# Altium PCB PoBoI.PcbDoc (part 2 of 3)
Units mm, origin at the board's own origin, x right, y up, seen from the top; angles counter-clockwise.
Board outline 90.25 x 95.8 mm, 4 copper layers (Top Layer, GND Layer, PWR Layer, Bottom Layer), stack 1.537 mm thick; 250 components, 177 nets, 942 pads, 26 vias.
Unrouted connection lines stored in the file: 170.
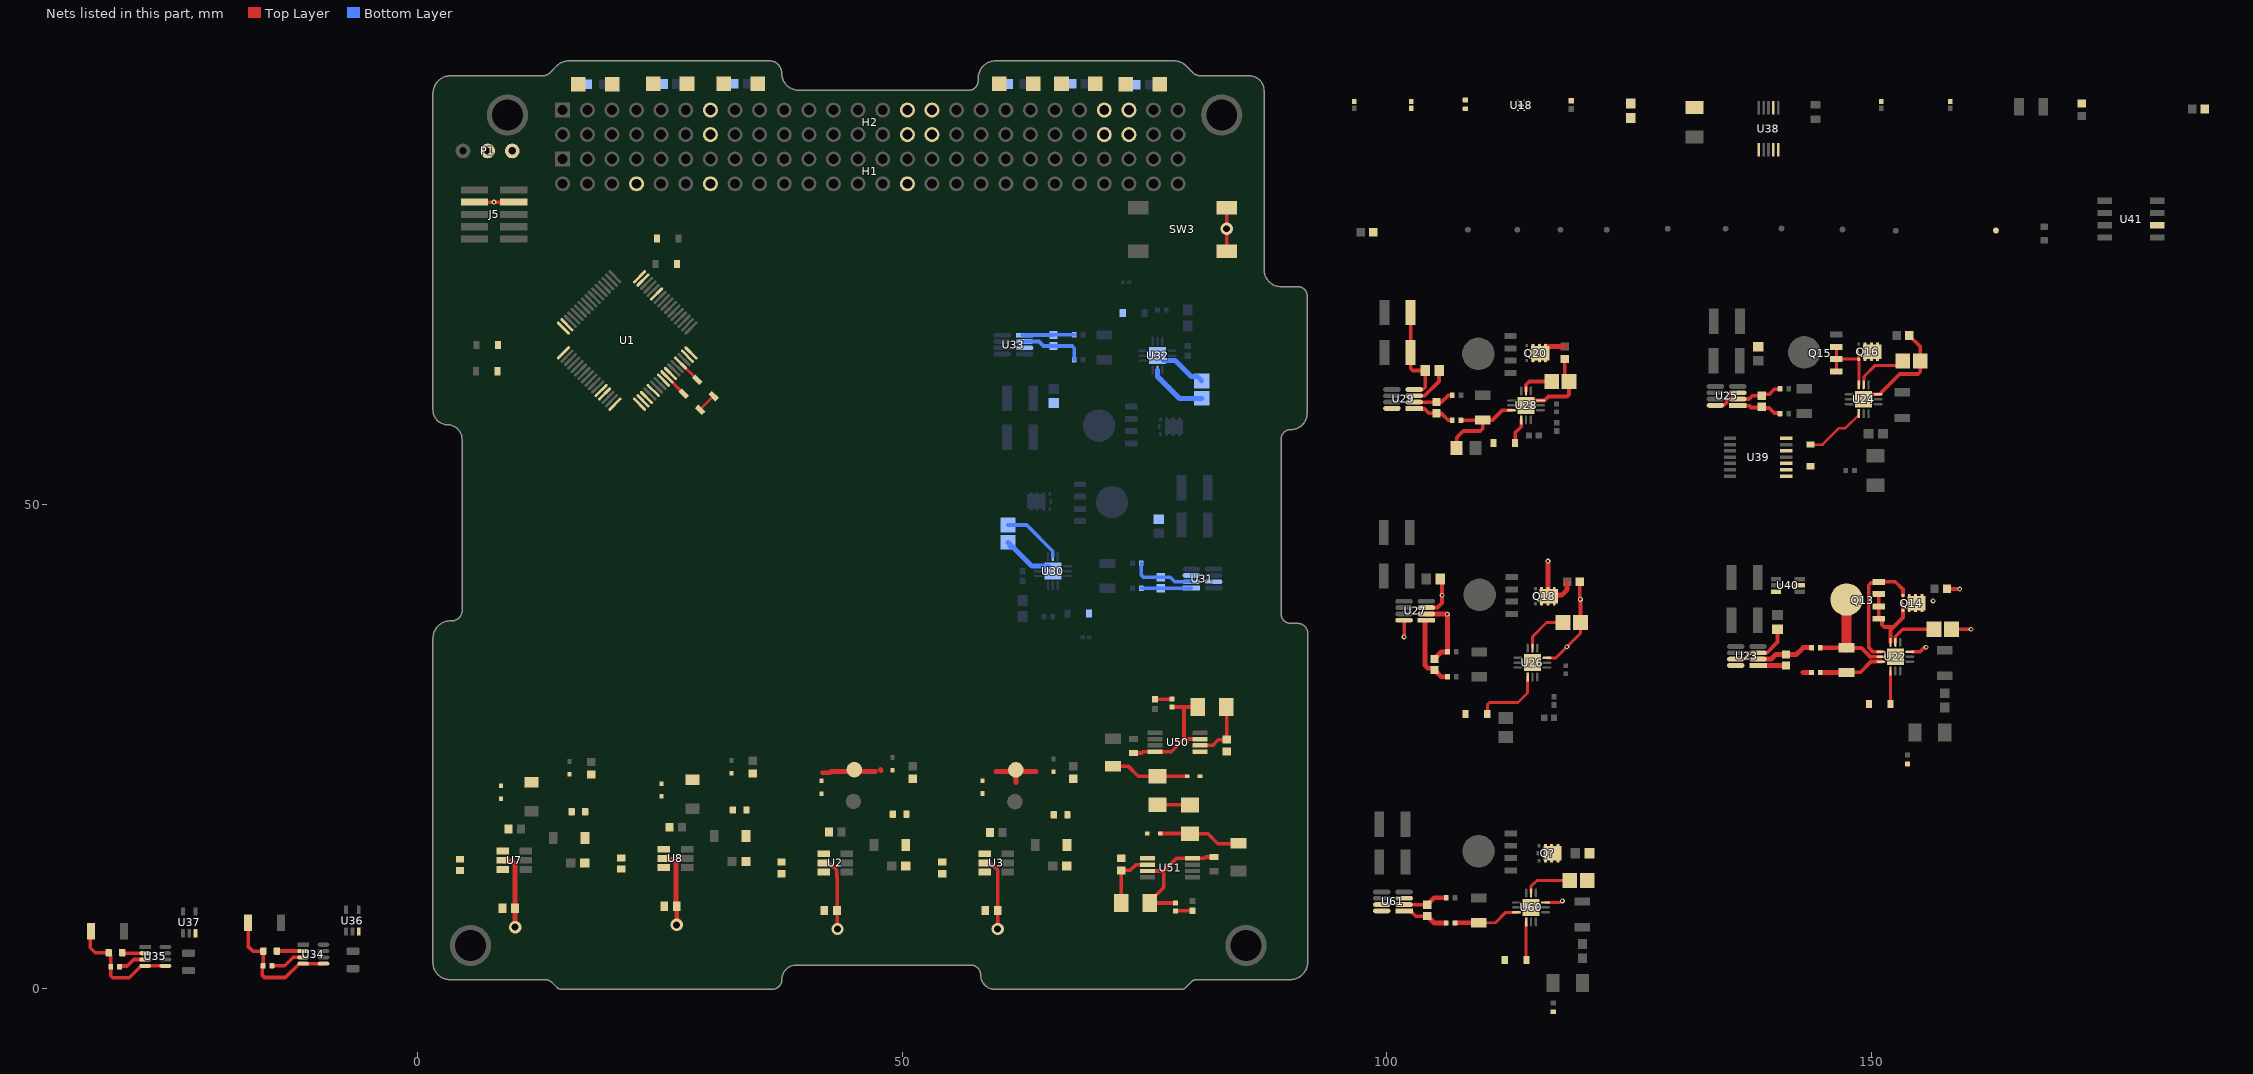
[diagram p4: the nets of this part, all layers, seen from the top]

## Part data
3V3 3V3P 3V3S 5V 5VP 5VS GND VBATT VBATTP VBATTS: library part CMP-00028-00002-2, "0.6mm round", Pins=1
C1 C2 C3 C4 C5 C6 C10 C11 C21 C23 C26 C28 C100 C101 C102: library part CMP-2006-03300-2, "CAP CER 0.1UF 50V X7R 0603 / C0603X104K5RACTU", Capacitance=100nF, Manufacturer=Kemet, Manufacturer Part Number=C0603X104K5RACTU, Package=C0603-CJ, Temperature="-55°C to +125°C", Temperature Characteristic=X7R, Temperature Coefficient=15%, Temperature Range High=+125°C, Temperature Range Low=-55°C, Tolerance=10%, Voltage=50V, Automotive=No, Category=Cap, ComponentLink2Description=Datasheet, ComponentLink2URL=https://content.kemet.com/datasheets/KEM_C1013_X7R_FT-CAP_SMD.pdf, Device Class L1="Passive Components", Device Class L2=Capacitors, Device Class L3="Ceramic Capacitors", Digikey Description="CAP CER 0.1UF 50V X7R 0603", Height=0.95mm, Ipc Land Pattern Name=CAPC16080X80, Lead Free=Yes, Material=Ceramic, Mouser Description="Capacitor; Ceramic; Cap 0.1uF; Tol+10%; SMT; Flexible Termination; Vol-Rtg 50V; TR", Octopart=https://octopart.com/c0603x104k5ractu-kemet-9145062, RoHS=TRUE, Voltage Rating=50V
C7 C19: library part CMP-13271-001107-1, "Cap Ceramic 1uF 25V X7R ±10% Pad SMD 0603 +125°C T/R / CL10B105KA8NFNC", Case Code (Imperial)=0603, Case Code (Metric)=1608, Dielectric=X7R, Max Operating Temperature=125°C, Min Operating Temperature=-55°C, Package Quantity=1, Tolerance=10%, Voltage Rating=25V, Capacitance=1uF, Case/Package=0603, Depth=0.8mm, Height=0.8mm, Lead Free="Lead Free", Length=0.063inch, Mount="Surface Mount", Packaging="Tape and Reel", Radiation Hardening=No, Thickness=0.035inch, Width=0.031inch
C8 C12 C24 C29: library part CMP-001-00075-4, "Chip Capacitor, 10µF +/-20%, 10V, 0603, Thickness 1 mm", Case/Package=0603, Max Operating Temperature=85°C, Min Operating Temperature=-55°C, Tolerance=10%, Voltage Rating=10V, Mounting Technology=SMT, Pins=2
C25 C27: library part CMP-13271-001107-1, "Cap Ceramic 1uF 25V X7R ±10% Pad SMD 0603 +125°C T/R", Case Code (Imperial)=0603, Case Code (Metric)=1608, Dielectric=X7R, Max Operating Temperature=125°C, Min Operating Temperature=-55°C, Package Quantity=1, Tolerance=10%, Voltage Rating=25V, Capacitance=1uF, Case/Package=0603, Depth=0.8mm, Height=0.8mm, Lead Free="Lead Free", Length=0.063inch, Mount="Surface Mount", Packaging="Tape and Reel", Radiation Hardening=No, Thickness=0.035inch, Width=0.031inch
C75 C76: library part CMP-001-00088-1, "Ceramic Capacitor, Multilayer, Ceramic, 6.3V, 10% +Tol, 10% -Tol, X5R, 15% TC, 1uF, Surface Mount, 0201", Capacitor Type=Ceramic, Case/Package=0201, Max Operating Temperature=85°C, Min Operating Temperature=-55°C, Mounting Technology="Surface Mount", Pins=2, RoHS Compliant=Yes
C77 C80 C83 C86 C89 C92 C122: library part CMP-001-00086-1, "Ceramic Capacitor, Multilayer, Ceramic, 50V, 10% +Tol, 10% -Tol, X7R, 15% TC, 0.18uF, Surface Mount, 0805", Capacitor Type=Ceramic, Case/Package=0805, Max Operating Temperature=125°C, Min Operating Temperature=-55°C, Mounting Technology="Surface Mount", Pins=2, RoHS Compliant=Yes
C78 C81 C84 C87 C90 C93 C120: library part CMP-001-00005-6, "Chip Capacitor, 1 uF, +/- 10%, 25 V, 0603 (1608 Metric)", Capacitor Type=Ceramic, Case/Package=0603, Max Operating Temperature=125°C, Min Operating Temperature=-55°C, Tolerance=10%, Voltage Rating=25V, Mounting Technology=SM, Pins=2, RoHS Compliant=True
C79 C82 C85 C88 C91 C94 C121: library part CMP-001-00004-6, "Chip Capacitor, 1 uF, +/- 10%, 16 V, 0603 (1608 Metric)", Capacitor Type=Ceramic, Case/Package=0603, Max Operating Temperature=125°C, Min Operating Temperature=-55°C, Tolerance=10%, Voltage Rating=16V, Mounting Technology=SM, Pins=2, RoHS Compliant=True
C95 C97: library part CMP-001-00056-4, "Chip Capacitor, 2,2µF +/-20%, 10V, 0402, Thickness 0.6 mm", Case/Package=0402, Max Operating Temperature=85°C, Min Operating Temperature=-55°C, Tolerance=10%, Voltage Rating=10V, Mounting Technology=SMT, Pins=2
C96 C98: library part CMP-001-00078-4, "Chip Capacitor, 1µF +/-40%, 50V, 0603, Thickness 1 mm", Case/Package=0603, Max Operating Temperature=85°C, Min Operating Temperature=-55°C, Tolerance=10%, Voltage Rating=50V, Mounting Technology=SMT, Pins=2
C99: library part CMP-001-00003-6, "Chip Capacitor, 1 uF, +/- 10%, 16 V, 0603 (1608 Metric)", Capacitor Type=Ceramic, Case/Package=0603, Max Operating Temperature=125°C, Min Operating Temperature=-55°C, Tolerance=10%, Voltage Rating=16V, Mounting Technology=SM, Pins=2, RoHS Compliant=True
C103 C104: library part CMP-2010-01302-2, "Chip Multilayer Ceramic Capacitors for General Purpose, 0201, 10pF, C0G, 30ppm/°C, 5%, 25V", Capacitance=10pF, Case Code (Imperial)=0201, Case Code (Metric)=0603, Dielectric=C0G, Max Operating Temperature=125°C, Min Operating Temperature=-55°C, Package Quantity=1, Tolerance=5%, Voltage Rating=25V, Case/Package=0201, Depth=0.3mm, Lead Free="Lead Free", Length=0.024inch, Mount="Surface Mount", Packaging="Tape and Reel", REACH SVHC="No SVHC", Series=GRM, Termination=SMD/SMT, Thickness=0.013inch, Voltage Rating (DC)=25V, Width=0.012inch
Cc Cc1: library part CMP-2008-03290-2, "CAP CER 2200PF 25V 5% NP0 0402", Capacitance="2,200 pF", Manufacturer=Kemet, Manufacturer Part Number=C0402C222J3GACTU, Package=C0402-BB, Temperature="-55°C to +125°C", Temperature Characteristic=C0G, Temperature Coefficient=15%, Temperature Range High=+125°C, Temperature Range Low=-55°C, Tolerance=0.05, Voltage Rating="25 V", Automotive=No, Category=Cap, ComponentLink2Description=Datasheet, ComponentLink2URL=https://content.kemet.com/datasheets/KEM_C1002_X7R_SMD.pdf, Device Class L1="Passive Components", Device Class L2=Capacitors, Device Class L3="Ceramic Capacitors", Digikey Description="CAP CER 2200PF 25V 5% NP0 0402", Height=0.55mm, Ipc Land Pattern Name=CAPC10050X50, Lead Free=Yes, Material=Ceramic, Mouser Description="Multilayer Ceramic Capacitors MLCC - SMD/SMT 25V 0.0022uF 5% C0G", Octopart=https://octopart.com/c0402c222j3gactu-kemet-9145102, RoHS=TRUE
Cin Cin1 Cout Cout1: library part CMP-13271-002013-1, "Cap Ceramic 22uF 16V X5R ±20% SMD 1206 +85°C Embossed T/R", Case Code (Imperial)=1206, Case Code (Metric)=3216, Dielectric=X5R, Max Operating Temperature=85°C, Min Operating Temperature=-55°C, Package Quantity=1, Tolerance=20%, Voltage=16V, Capacitance=22uF, Case/Package=1206, Depth=1.6mm, Height=0.85mm, Lead Free="Lead Free", Length=3.2mm, Mount="Surface Mount", Packaging="Tape and Reel", Radiation Hardening=No, Thickness=0.037inch, Voltage Rating=16V, Width=0.063inch
D1 D3 D5 D7 D11 D12 D52 D53 D54 D55: library part CMP-07163-000008-1, "DIODE GEN PURP 75V 200MA SOD523F", Capacitance=4pF, Forward Current=300mA, Manufacturer="ON Semiconductor", Max Junction Temp=+150°C, Max Repetitive Reverse Voltage=75V, Package=502-01, Peak Reverse Current=5uA, Reverse Voltage=100V, Temperature="-55°C to +150°C", Temperature Range Low=-55°C, Automotive=No, Category=Diode, ComponentLink2Description=Datasheet, ComponentLink2URL=https://www.onsemi.com/pub/Collateral/1N914BWT-D.pdf, Device Class L1="Discrete Semiconductors", Device Class L2=Diodes, Device Class L3="Rectifier Diodes", Digikey Description="DIODE GEN PURP 75V 200MA SOD523F", Footprint Url=https://www.onsemi.com/pub/Collateral/502-01.PDF, Height=0.7mm, Ipc Land Pattern Name=SODFL16080X60, Lead Free=Yes, Manufacturer Part Number=1N914BWT, Mouser Description="Diodes - General Purpose, Power, Switching SINGLE JUNC. 100V 4.0NS COMP", Octopart=https://octopart.com/1n914bwt-on+semiconductor-84323166, RoHS=TRUE, Temperature Range High=+150°C
D2 D4 D6 D8: library part CMP-2000-05113-2, "DIODE SCHOTTKY 30V 500MA SOD123", Average Rectified Current=500mA, Forward Voltage=430mV, Max Forward Surge Current (Ifsm)=5.5A, Max Operating Temperature=150°C, Max Repetitive Reverse Voltage (Vrrm)=30V, Max Reverse Leakage Current=130uA, Min Operating Temperature=-65°C, Package Quantity=1, Contact Plating=Tin, Current Rating=500mA, Element Configuration=Single, Forward Current=500mA, Height=1.03mm, Lead Free="Lead Free", Length=2.7mm, Max Reverse Voltage (DC)=30V, Max Surge Current=5.5A, Mount="Surface Mount", Number of Pins=2, Output Current=500mA, Packaging="Tape and Reel", Peak Non-Repetitive Surge Current=5.5A, Peak Reverse Current=130uA, Polarity=Standard, Radiation Hardening=No, REACH SVHC="No SVHC", Voltage Rating (DC)=30V, Weight=0.03g, Width=1.6mm
D38 D41 D47 D50 D56 D57 D58 D59 D60 D61 D?: library part CMP-1060-00650-1, "Zener Voltage Regulator, 300 mW, 2-Pin SOD-323, Pb-Free, Tape and Reel", Manufacturer="On Semiconductor", ComponentLink1Description="Manufacturer URL", ComponentLink1URL=http://www.onsemi.com/, ComponentLink2Description=Datasheet, ComponentLink2URL=http://www.onsemi.cn/pub_link/Collateral/MM3Z2V4T1-D.PDF, ComponentLink3Description="Package Specification", ComponentLink3URL=http://www.onsemi.com/pub_link/Collateral/477-02.PDF.1, DatasheetVersion="Rev. 9", Mounting Technology="Surface Mount", P Max (W)=0.3, PackageDescription="2-Pin SOD, Body 1.7 x 1.25 mm", PackageReference=SOD-323-2-477-02, PackageVersion="Rev. H, 03/2007", Packing="Tape and Reel", PartNumber=MM3Z3V6T1G, RoHS=Pb-Free, VZ Typ (V)=3.6
D63: library part CMP-004-00035-2, "Rectifier Diode, 1 Phase, 1 Element, 0.15A, 100V V(RRM), Silicon"
D64: library part CMP-004-00035-3, "Rectifier Diode, 1 Phase, 1 Element, 0.15A, 100V V(RRM), Silicon"
H1 H2: library part CMP-1023-00317-1, "SQ Post Socket, Through-hole, Vertical, -55 to 125 degC, 2.54 mm Pitch, 52-Pin, Female, RoHS", Manufacturer=Samtec, Temperature Range="-55 to 125 degC", ComponentLink1Description="Manufacturer URL", ComponentLink1URL=http://www.samtec.com, ComponentLink2Description=Datasheet, ComponentLink2URL=http://www.samtec.com/documents/webfiles/pdf/SSQ_TH.PDF, ComponentLink3Description="Package Specification", ComponentLink3URL=http://www.samtec.com/documents/webfiles/cpdf/SSQ-1XX-XX-XXX-X-XX-XXX-XX-X-MKT.pdf, DatasheetVersion=F-214, Mounting Technology=Through-hole, Orientation=Vertical, PackageDescription="Assembly, Socket Strip .025[0.64] SQ Tail", PackageReference=SSQ-126-22-X-D, PackageVersion="BD, 6/1987", PartNumber=SSQ-126-22-G-D, Pitch="2.54 mm", RoHS=True
J5: library part CMP-002-00076-1, "Board Connector, 10 Contact(s), 2 Row(s), Male, Straight, 0.05 inch Pitch, Surface Mount Terminal, Locking", Connector Type="BOARD CONNECTOR", Mounting Technology=Board, RoHS Compliant=Yes
L1 L2: library part CMP-06042-015693-1, "Wire Wound Ferrite Inductor for General Circuits 15μH ±10% 0.73Ω 360mA 1812", Case Code (Imperial)=1812, Case Code (Metric)=4532, Current Rating=360mA, DC Resistance (DCR)=730mR, Frequency=19MHz, Max Operating Temperature=85°C, Min Operating Temperature=-40°C, Package Quantity=500, Resistor Type=Wirewound, Test Frequency=1MHz, Tolerance=10%, Case/Package=1812, Core Material=Ferrite, DC Current=360mA, Depth=3.4mm, Height=2.6mm, Height - Seated (Max)=0.11inch, Inductance=15uH, Lead Free="Lead Free", Length=4.5mm, Max DC Current=360mA, Military Standard=Not, Mount="Surface Mount", Packaging="Tape and Reel", Q Factor=35, Radiation Hardening=No, Self Resonant Frequency=19MHz, Series=LQH43M, Series Resistance=730mR, Shielding=Unshielded, Termination=SMD/SMT, Weight=0.004586oz, Width=3.2mm
L3 L4: library part CMP-006-00022-2, "Inductor Power Molded Wirewound 10uH 20% 100KHz 1.2A 0.522Ohm DCR Automotive T/R", DC Resistance MAX="522 mOhms", DC Resistance Typical="435 mOhms", Inductance=10uH, Rated Current=1.20A, Saturation Current=1.6A
L11 L12: library part CMP-08253-000012-2, "Shielded Multilayer Inductor 10uH ±20% 250mA 1365mΩ SMD 0603", Case Code (Imperial)=0603, Case Code (Metric)=1608, Current Rating=250mA, DC Resistance (DCR)=1.365R, Max Operating Temperature=125°C, Min Operating Temperature=-55°C, Package Quantity=4000, Resistance=1.05R, Saturation Current=90mA, Self Resonant Frequency=50MHz, Test Frequency=2MHz, Tolerance=20%, Case/Package=0603, Core Material=Ferrite, Height - Seated (Max)=0.037inch, Inductance=10uH, Length=0.063inch, Mount="Surface Mount", Packaging="Tape and Reel", RoHS Compliant=Yes, Shielding=Shielded, Width=0.031inch
LED1 LED2 LED3 LED4 LED5 LED6: library part CMP-21615-000001-1, "LED RED DIFFUSED CHIP SMD", Case Code (Imperial)=1206, Case Code (Metric)=3216, Color=Red, Forward Current=20mA, Forward Voltage=2.1V, Lens Color=White, Max Operating Temperature=85°C, Min Operating Temperature=-40°C, Package Quantity=1, Power Dissipation=65mW, Reverse Voltage=5V, Case/Package=1206, Depth=1.6mm, Dominant Wavelength=626nm, Height=1.1mm, Illumination Color=Red, Lead Free="Lead Free", Length=3.2mm, Lens Style=Rectangular, Lens Transparency=Diffused, Luminous Intensity=10mcd, Mount="Surface Mount", Number of Elements=1, Number of LEDs=1, Number of Pins=2, Packaging="Tape and Reel", Power Rating=65mW, Radiation Hardening=No, REACH SVHC="No SVHC", Test Current=20mA, Viewing Angle=170°, Wavelength=626nm, Width=1.6mm
P1: library part CMP-002-00073-2, "KK 254 Breakaway Header, Vertical, 3 Circuits, 0.76µm Gold (Au) Selective Plating, Mating Pin Length 6.09mm", Max Operating Temperature=75°C, Min Operating Temperature=0°C, Voltage Rating=250V, Gender=Male, Mounting Technology="Through Hole", Pins=3
Q13 Q15 Q17 Q19 Q20 Q21 Q23: library part CMP-013-00040-1, "Power Field-Effect Transistor, 23.5A I(D), 60V, 0.00625ohm, 1-Element, N-Channel, Silicon, Metal-oxide Semiconductor FET", Max Operating Temperature=150°C, Pins=5, RoHS Compliant=Yes
Q14 Q16 Q18 Q20 Q22 Q24 Q?: library part CMP-013-00041-1, "Power Field-Effect Transistor, 11.6A I(D), 30V, 0.0145ohm, 1-Element, N-Channel, Silicon, Metal-oxide Semiconductor FET", Max Operating Temperature=150°C, Pins=3, RoHS Compliant=Yes
R9 R12: library part CMP-2000-03264-2, "RES Thick Film, 35.7kΩ, 1%, 0.1W, 100ppm/°C, 0603", Case Code (Imperial)=0603, Case Code (Metric)=1608, Max Operating Temperature=155°C, Max Power Dissipation=100mW, Min Operating Temperature=-55°C, Package Quantity=10, Resistance=35.7kR, Temperature Coefficient=100ppm/°C, Tolerance=1%, Voltage Rating=75V, Case/Package=0603, Composition="Thick Film", Contact Plating=Tin, Depth=0.85mm, Features="Automotive AEC-Q200", Height=0.45mm, Length=1.55mm, Military Standard=Not, Number of Pins=2, Number of Terminations=2, Packaging="Tape and Reel", Power Rating=100mW, Radiation Hardening=No, Termination=Solder, Weight=7.1E-05oz, Width=0.033inch
R11 R26 R29 R44: library part CMP-1666-00005-4, "Chip Resistor, 10 KOhm, +/- 1%, 100 mW, -55 to 155 degC, 0603 (1608 Metric), RoHS, Tape and Reel / CRCW060310K0FKEA", Manufacturer="Vishay Semiconductor", Max Operating Temperature="155 degC", Min Operating Temperature="-55 degC", Package Quantity=5000, Voltage Rating="75 V", ComponentLink1Description="Manufacturer URL", ComponentLink1URL=http://www.vishay.com/, ComponentLink2Description=Datasheet, ComponentLink2URL=https://datasheet.ciiva.com/11809/0900766b80d98afc-11809037.pdf, DatasheetVersion=06/2012, Height="0.45 mm", Length="1.55 mm", Mounting Technology="Surface Mount", PackageDescription="2-Pin Surface Mount Device, Body 1.575 x 0.85 mm", PackageReference=0603, Packaging="Tape and Reel", REACH SVHC=Unknown, RoHSCompliant=true
R28 R34: library part CMP-2000-03094-1, Manufacturer="Vishay Dale", Part Number=CRCW060322K1FKEA
R40: library part CMP-2002-07452-1, Manufacturer="Yageo / Phycomp", Part Number=RC0402FR-071K1L
R41: library part CMP-009-00099-2, "3K 0.063W 1% 0402 (1005 Metric)  SMD", Case/Package=0402, Power=63mW, Tolerance=1%, Mounting Technology=SMT, Pins=2
R80 R90 R151: library part CMP-009-00110-2, "768K 0.063W 1% 0402 (1005 Metric)  SMD", Case/Package=0402, Power=63mW, Tolerance=1%, Mounting Technology=SMT, Pins=2
R81 R91 R152: library part CMP-009-00195-1, "Fixed Resistor, Metal Glaze/thick Film, 0.25W, 7500ohm, 200V, 1% +/-Tol, 100ppm/Cel, Surface Mount, 1206", Case/Package=1206, Max Operating Temperature=155°C, Min Operating Temperature=-55°C, Power=250mW, Tolerance=1%, Mounting Technology="Surface Mount", Pins=2, RoHS Compliant=Yes
R82 R92 R153: library part CMP-009-00194-1, "Fixed Resistor, Thin Film, 0.15W, 80000ohm, 75V, 0.1% +/-Tol, 25ppm/Cel, Surface Mount, 0603", Case/Package=0603, Max Operating Temperature=150°C, Min Operating Temperature=-55°C, Power=150mW, Tolerance=0.1%, Mounting Technology="Surface Mount", Pins=2, RoHS Compliant=Yes
R83 R93 R154: library part CMP-009-00193-1, "Fixed Resistor, Thin Film, 0.25W, 150000ohm, 200V, 1% +/-Tol, 50ppm/Cel, Surface Mount, 1206", Case/Package=1206, Max Operating Temperature=155°C, Min Operating Temperature=-55°C, Power=250mW, Tolerance=1%, Mounting Technology="Surface Mount", Pins=2, RoHS Compliant=Yes
R84 R94 R103 R112 R121 R130 R150: library part CMP-26527-000133-1, "General Purpose Thick Film Chip Resistor, 1206, 25mΩ, 1%, 0.5W", Case Code (Imperial)=1206, Case Code (Metric)=3216, Max Operating Temperature=155°C, Max Power Dissipation=500mW, Min Operating Temperature=-55°C, Resistance=25m, Resistor Type="Thick Film", Temperature Coefficient=100ppm/°C, Tolerance=1%, Case/Package=1206, Construction=Rectangular, Contact Plating=Tin, Depth=1.55mm, Height=0.026inch, Lead Free="Lead Free", Length=0.12inch, Military Standard=Not, Mount="Surface Mount", Number of Terminations=2, Packaging="Tape and Reel", Power Rating=500mW, Radiation Hardening=No, RoHS Compliant=Yes, Series=CSR, Size Code=1206, Width=0.061inch
R85: library part CMP-009-00069-2, "120R 0.1W 5% 0603 (1608 Metric)  SMD", Case/Package=0603, Power=100mW, Tolerance=5%, Mounting Technology=SMT, Pins=2
R86 R87 R95 R96 R104 R105 R113 R114 R122 R123 R131 R132 R155 R156: library part CMP-009-00152-3, "Chip Resistor, 10 Ohms, +/-1 %, 63 mW, -55 to 155 degC, 0402", Case/Package=0402, Max Operating Temperature=155°C, Min Operating Temperature=-55°C, Power=63mW, Tolerance=1%, Pins=2
R88 R89 R97 R98 R106 R107 R115 R116 R124 R125 R133 R134 R157 R158: library part CMP-009-00192-1, "Fixed Resistor, Metal Glaze/thick Film, 0.5W, 3300ohm, 200V, 5% +/-Tol, 200ppm/Cel, Surface Mount, 1210", Case/Package=1210, Max Operating Temperature=155°C, Min Operating Temperature=-55°C, Power=500mW, Tolerance=5%, Mounting Technology="Surface Mount", Pins=2, RoHS Compliant=Yes
R99 R108: library part CMP-009-00197-1, "Fixed Resistor, Metal Glaze/thick Film, 0.125W, 732000ohm, 150V, 1% +/-Tol, 100ppm/Cel, Surface Mount, 0805", Case/Package=0805, Max Operating Temperature=155°C, Min Operating Temperature=-55°C, Power=125mW, Tolerance=1%, Mounting Technology="Surface Mount", Pins=2, RoHS Compliant=Yes
R100 R109: library part CMP-009-00015-5, "Chip Resistor, 10 KOhm, +/- 1%, 0.1 W, -55 to 155 degC, 0402 (1005 Metric)", Case/Package=0402, Max Operating Temperature=155°C, Min Operating Temperature=-55°C, Power=100mW, Tolerance=1%, Voltage Rating=50V, Mounting Technology=SM, Pins=2, RoHS Compliant=True
R101 R110: library part CMP-009-00202-1, "Fixed Resistor, Metal Glaze/thick Film, 0.0625W, 60400ohm, 50V, 1% +/-Tol, 100ppm/Cel, Surface Mount, 0402", Case/Package=0402, Max Operating Temperature=155°C, Min Operating Temperature=-55°C, Power=62.5mW, Tolerance=1%, Mounting Technology="Surface Mount", Pins=2, RoHS Compliant=Yes
R102 R111: library part CMP-009-00204-1, "Fixed Resistor, Metal Glaze/thick Film, 0.2W, 220000ohm, 50V, 5% +/-Tol, 200ppm/Cel, Surface Mount, 0402", Case/Package=0402, Max Operating Temperature=155°C, Min Operating Temperature=-55°C, Power=200mW, Tolerance=5%, Mounting Technology="Surface Mount", Pins=2, RoHS Compliant=Yes
R117 R126: library part CMP-009-00205-1, "Fixed Resistor, Metal Glaze/thick Film, 0.05W, 866000ohm, 25V, 1% +/-Tol, -200,200ppm/Cel, 0201", Case/Package=0201, Max Operating Temperature=125°C, Min Operating Temperature=-55°C, Power=50mW, Tolerance=1%, Pins=2, RoHS Compliant=Yes
R118 R127: library part CMP-009-00089-2, "2K37 0.063W 1% 0402 (1005 Metric)  SMD", Case/Package=0402, Power=63mW, Tolerance=1%, Mounting Technology=SMT, Pins=2
R119 R128: library part CMP-009-00206-1, "Fixed Resistor, Metal Glaze/thick Film, 0.1W, 37400ohm, 75V, 1% +/-Tol, 100ppm/Cel, Surface Mount, 0603", Case/Package=0603, Max Operating Temperature=155°C, Min Operating Temperature=-55°C, Power=100mW, Tolerance=1%, Mounting Technology="Surface Mount", Pins=2, RoHS Compliant=Yes
R120 R129: library part CMP-009-00022-5, "Chip Resistor, 100 KOhm, +/- 1%, 0.1 W, -55 to 155 degC, 0402 (1005 Metric)", Case/Package=0402, Max Operating Temperature=155°C, Min Operating Temperature=-55°C, Power=100mW, Tolerance=1%, Voltage Rating=50V, Mounting Technology=SM, Pins=2, RoHS Compliant=True
R135 R136: library part CMP-009-00076-2, "1K 0.125W 5% 0805 (2012 Metric)  SMD", Case/Package=0805, Power=125mW, Tolerance=5%, Mounting Technology=SMT, Pins=2
R137: library part CMP-009-00025-5, "Chip Resistor, 100 KOhm, +/- 1%, 0.25 W, -55 to 155 degC, 1206 (3216 Metric)", Case/Package=1206, Max Operating Temperature=155°C, Min Operating Temperature=-55°C, Power=250mW, Tolerance=1%, Voltage Rating=200V, Mounting Technology=SM, Pins=2, RoHS Compliant=True
R138: library part CMP-009-00017-5, "Chip Resistor, 10 KOhm, +/- 1%, 01 W, -55 to 155 degC, 0603 (1608 Metric)", Case/Package=0603, Max Operating Temperature=155°C, Min Operating Temperature=-55°C, Power=100mW, Tolerance=1%, Voltage Rating=50V, Mounting Technology=SM, Pins=2, RoHS Compliant=True
Rc Rc1: library part CMP-2002-08403-1, Manufacturer="Vishay Dale", Part Number=CRCW040224K0FKED
RFB1 RFB11: library part CMP-2003-00461-1, Manufacturer=Panasonic, Part Number=ERJ-8ENF64R9V
RFB2 RFB21: library part CMP-2000-00636-2, "RES SMD 7.5K OHM 1% 1/10W 0603", Case Code (Imperial)=0603, Case Code (Metric)=1608, Max Operating Temperature=155°C, Max Power Dissipation=100mW, Min Operating Temperature=-55°C, Package Quantity=1, Resistance=7.5kR, Resistance Tolerance=1%, Resistor Type="Thick Film", Temperature Coefficient=100ppm/°C, Voltage Rating=75V, Voltage Rating (DC)=50V, Case/Package=0603, Construction=Rectangular, Contact Plating=Tin, Depth=0.8mm, Features="Automotive AEC-Q200", Height=0.022inch, Lead Free="Lead Free", Length=1.6mm, Military Standard=Not, Mount="Surface Mount", Number of Terminations=2, Packaging="Tape and Reel", Power Rating=100mW, Radiation Hardening=No, REACH SVHC="No SVHC", RoHS Compliant=Yes, Series=ERJ, Termination=SMD/SMT, Tolerance=1%, Width=0.8mm
RLED1 RLED2: library part CMP-1659-00057-1, "Chip Resistor, 150 Ohm, +/- 1%, 0.1 W, -55 to 155 degC, 0603 (1608 Metric), RoHS, Tape and Reel / RC0603FR-07150RL", Case\Package=Radial, Colour=Green, Forward Voltage="2.2 V", Package Quantity=1000, ComponentLink1Description="Manufacturer URL", ComponentLink1URL=http://www.yageo.com/, ComponentLink2Description=Datasheet, ComponentLink2URL=http://www.yageo.com/documents/recent/PYu-RC_Group_51_RoHS_L_04.pdf, DatasheetVersion="Rev. 4, 02/2016", Height="8.6 mm", Illumination Colour=Green, Lens Style=Clear, Luminous Intensity="200 mcd", Mount="Through Hole", Nominal Vf="2.2 V", PackageDescription="2-Pin Surface Mount Device, Body 1.6 x 0.8 mm", PackageReference=0603, Packaging=Bulk, RoHSCompliant=true, Viewing Angle="20 degrees"
RLED3 RLED4: library part CMP-2000-00001-1, "240 Ohm 0603 / ERA3AEB244V", Manufacturer=Panasonic, Part Number=ERA3AEB244V
RLED5 RLED6: library part CMP-1012-00468-3, "RES Thick Film, 430Ω, 1%, 0.1W, 100ppm/°C, 0603 / CRCW0603430RFKEA", Case Code (Imperial)=0603, Case Code (Metric)=1608, Max Operating Temperature=155°C, Max Power Dissipation=100mW, Min Operating Temperature=-55°C, Package Quantity=10, Resistance=430R, Temperature Coefficient=100ppm/°C, Tolerance=1%, Voltage Rating=75V, Case/Package=0603, Composition="Thick Film", Contact Plating=Tin, Depth=0.85mm, Features="Automotive AEC-Q200", Height=0.45mm, Lead Free="Lead Free", Length=1.55mm, Military Standard=Not, Mount="Surface Mount", Number of Pins=2, Number of Terminations=2, Packaging="Tape and Reel", Power Rating=100mW, Radiation Hardening=No, Termination=SMD/SMT, Voltage Rating (DC)=75V, Weight=7.1E-05oz, Width=0.033inch, Working Voltage=75V
SW1 SW2: library part CMP-011-00000-2, "Tactile Switch, SPST-NO, 0.05 A, 12 V, -25 to 70 degC, 2-Pin SMD, RoHS, Tape and Reel", Case/Package=B3U-1000, Contact Current Rating=50mA, IP Rating=IP40, Manufacturer="Omron Electronic Components", Max Contact Resistance=100mohm, Max Operating Temperature=70°C, Max Voltage Rating (DC)=12V, Min Operating Temperature=-25°C, Operating Force=153gf, Package Description="2-Pin Surface Mount Device, Body 3 x 2.5 mm", Package Quantity=3500, Resistance=0.1Ohm, Contact Material=Silver, Current Rating=50mA, Datasheet URL=http://www.omron.com/ecb/products/pdf/en-b3u.pdf, Datasheet Version=Jan-15, Manufacturer URL=http://www.omron.com/, Max Current Rating=50mA, Mounting Technology=SM, Package Reference=B3U-1000, Packaging=TapeandReel, RoHS Compliant=True, Throw Configuration=SPST, Voltage Rating=12V, Voltage Rating (DC)=12V
SW3: library part CMP-011-00014-3, "Momentary Switch", Rated Current Max="0.01 mA", Rated Current Min="50 mA", Rated Voltage Max="1 V", Rated Voltage Min="12 V", DataSheet=https://www.cuidevices.com/product/resource/ts04.pdf
U1: library part CMP-0237-00201-3, "ARM Cortex-M3 32-bit MCU, 512 KB Flash, 64 KB Internal RAM, 51 I/Os, 64-pin LQFP, -40 to 85 degC, Tray", I/Os (High Current)=51, Operating Frequency(F) (Processor speed) (MHz)=72, Supply Voltage(Vcc) min (V)=2, A/D Converter="3x12-bit (16 Channel)", ComponentLink1Description="Manufacturer URL", ComponentLink1URL=http://www.st.com/web/en/home.html, ComponentLink2Description=Datasheet, ComponentLink2URL=http://www.st.com/st-web-ui/static/active/en/resource/technical/document/datasheet/CD00191185.pdf, ComponentLink3Description="Package Specification", ComponentLink3URL=http://www.st.com/st-web-ui/static/active/en/resource/technical/document/datasheet/DM00037051.pdf, Core="ARM Cortex-M3", D/A Converter="2x12-bit (2 Channel)", DatasheetVersion="Rev. 8", FLASH Size (Prog) (kB)=512, Internal RAM Size (kB)=64, Mounting Technology="Surface Mount", PackageDescription="64-Pin Low Profile Quad Flat Package, 10 x 10 mm Body, 0.5 mm Pitch", PackageReference=LQFP64, PackageVersion="Rev. 4, 06/2013", Packing=Tray, PartNumber=STM32F103RET6
U2 U3 U7 U8: library part CMP-0491-01627-1, "600 mA, 1.4 MHz Step-Down Switching Regulator, 6-pin SOT23 (S6-6), -40 to 85 degC, Pb-Free, Mini Tape and Reel", Manufacturer="Linear Technology", ComponentLink1Description="Manufacturer URL", ComponentLink1URL=http://www.linear.com/, ComponentLink2Description=Datasheet, ComponentLink2URL=http://cds.linear.com/docs/en/datasheet/lt1616fs.pdf, ComponentLink3Description="Package Specification", ComponentLink3URL=http://cds.linear.com/docs/en/datasheet/175435f.pdf, Mounting Technology="Surface Mount", Number of Outputs=1, PackageDescription="6-Pin Plastic SOT-23, Body 1.625 x 2.9 mm, Pitch 0.95 mm", PackageReference=S6-6, PackageVersion=Aug-07, Packing="Mini Tape and Reel", PartNumber=LT1616ES6#TRMPBF, RoHS=TRUE
U18: library part CMP-019-00040-3, "Ultra-Low-Noise, Low-IQ LDO, 3.3 V, 0.25 A, -40 to 125 degC, 4-Pin X2SON, RoHS, Tape and Reel", Max Operating Temperature=125°C, Min Operating Temperature=-40°C, Output Voltage=3.3V, Pins=5
U22 U24 U26 U28 U30 U32 U60: library part CMP-019-00049-1, "Switching Controller, CMOS, PQCC12", Case/Package=HVQCCN, Max Operating Temperature=85°C, Max Supply Voltage=36V, Min Operating Temperature=-40°C, Pins=12, RoHS Compliant=Yes
U23 U25 U27 U29 U31 U33 U61: library part CMP-010-00025-1, "Power Supply Support Circuit, Fixed, 2 Channel, 2V, PDSO8", Case/Package=LSSOP, Max Operating Temperature=125°C, Max Supply Voltage=5.5V, Min Operating Temperature=-40°C, Min Supply Voltage=3V, Nominal Supply Voltage=3.3V, Pins=8, RoHS Compliant=Yes
U34 U35: library part CMP-00023-00003-1, "Power Supply Management Circuit, Adjustable, 1 Channel, BICMOS, PDSO8", Case/Package=LSSOP, Max Operating Temperature=125°C, Min Operating Temperature=-40°C, Pins=8, RoHS Compliant=Yes
U36 U37: library part CMP-016-00011-1, "AND Gate, AUP/ULP/V Series, 1-Func, 2-Input, CMOS, PDSO5", Case/Package=TSSOP, Max Operating Temperature=125°C, Max Supply Voltage=3.6V, Min Operating Temperature=-40°C, Min Supply Voltage=800mV, Nominal Supply Voltage=3.3V, Logic Type="AND GATE", Pins=5, RoHS Compliant=Yes
U38: library part CMP-015-00009-7, "Interface Circuit, PDSO10", Case/Package=TSSOP, Max Operating Temperature=70°C, Max Supply Voltage=5.5V, Min Operating Temperature=0°C, Min Supply Voltage=2.7V, Nominal Supply Voltage=3.3V, Pins=10, RoHS Compliant=Yes
U39: library part CMP-016-00013-1, "Inverter, AC Series, 6-Func, 1-Input, CMOS, PDSO14", Case/Package=TSSOP, Max Operating Temperature=85°C, Max Supply Voltage=6V, Min Operating Temperature=-40°C, Min Supply Voltage=2V, Nominal Supply Voltage=3.3V, Logic Type=INVERTER, Pins=14, RoHS Compliant=Yes
U40: library part CMP-019-00050-1, "Bus Driver, LVC/LCX/Z Series, 1-Func, 1-Bit, True Output, CMOS, PDSO6", Case/Package=TSSOP, Max Operating Temperature=125°C, Max Supply Voltage=5.5V, Min Operating Temperature=-40°C, Min Supply Voltage=1.65V, Pins=6, RoHS Compliant=Yes
U41: library part CMP-015-00010-2, "Line Transceiver, 1 Func, 1 Driver, 1 Rcvr, BICMOS, PDSO10", Case/Package=HVSON, Max Operating Temperature=85°C, Max Supply Voltage=5.25V, Min Operating Temperature=-40°C, Min Supply Voltage=4.75V, Nominal Supply Voltage=5V, Pins=10, RoHS Compliant=Yes
U50 U51: library part CMP-0069-01733-3, "600kHz/1.3MHz Step-up PWM DC/DC Converter, 8-pin MSOP, Pb-Free", Manufacturer="Texas Instruments", PackageTopMarking=ZXTT*S18B, PowerWise=N, Code_JEDEC=MO-187-AA, ComponentLink1Description="Datasheet URL", ComponentLink1URL=http://www.ti.com/general/docs/lit/getliterature.tsp?genericPartNumber=LM2622&fileType=pdf, CompType=Switcher, PackageDescription="MINI SOIC, .118 x .118 x .034in, 8 Lead, .0256in Pitch", PackageReference=DGK0008A, PinCount=8, RoHS=Y
Y1: library part CMP-003-00029-1, "Crystal 32.768kHz 10ppm 7pF -40C +85C", Frequency=32.768kHz, Pins=2

## Free pads (board coordinates)
  round 4.25 hole 3.18: 3(5.477,4.47) 3(9.28,90.17) 3(82.982,90.17) 3(85.481,4.47)

## Via types
v1: diameter 0.508, hole 0.254, Top Layer to Bottom Layer, 17 vias
v2: diameter 1.27, hole 0.711, Top Layer to Bottom Layer, 6 vias
v3: diameter 0.4, hole 0.18, Top Layer to Bottom Layer, 3 vias

## Nets (pads, with @x,y where several pads share a name; then routed paths per layer and width w, separated by ;. In a path a pad name is that pad's centre, name@x,y a point inside that pad or via, vN(x,y) a via of type N, cw(c..) or ccw(c..) an arc to the next point about the centre after c; other vN are vias at no path point)
3V3: C88.1 R108.1 R112.1 R113.1 R115.1 R116.1 U28.12 U29.4 | length 21
  Top Layer w0.381: R116.1@102.473,69.799 R115.1@102.473,65.659 102.473,64.028 102.696,63.805 C88.1@103.974,63.805 103.974,62.088 103.751,61.865 102.866,61.865 U29.4@102.845,61.843 ; R108.1@107.202,55.804 107.242,55.844 107.242,56.883 107.915,57.556 109.652,57.556 109.931,57.836 R112.1@109.931,58.693 110.915,58.693 111.912,59.691 U28.12@112.894,59.691 ; R113.1@107.663,58.674 107.673,58.684 R112.1@109.922,58.684
3V3_1: C24.2 D5.2 D54.2 L3.2 R28.2
3V3_2: C29.2 D7.2 D55.2 L4.2 R34.2
3V3_EnableP: D58.1 U26.1 | length 7.3
  Top Layer w0.3: D58.1@110.386,28.372 110.386,29.314 110.612,29.54 113.563,29.54 114.545,30.521 U26.1@114.545,32.173
3V3_EnablePWD: U39.2
3V3_EnableS: D59.1 U28.1 | length 2.6
  Top Layer w0.381: D59.1@113.256,56.337 113.256,57.376 113.884,58.004 U28.1@113.884,58.715
3V3_LDO: C76.1 U1.1 U1.13 U1.19 U1.32 U1.48 U1.64 U18.1
3V3_Primary: Q18.1 Q18.2 Q18.3 Q18.6 Q18.7 Q18.8 Q18.10 | length 5.8
  Top Layer w0.508: Q18.2@116.637,41.38 v1(116.637,44.145) ; Q18.10@116.731,40.53 116.823,40.621 118.066,40.621 118.628,41.184 118.628,42.012
3V3_Secondary: Q20.1@116.409,66.458 Q20.2@115.759,66.458 Q20.3@115.109,66.458 Q20.6 Q20.7 Q20.8 Q20.10 | length 8.2
  Top Layer w0.305: Q20.6@115.109,64.758 115.109,65.011 Q20.10@115.707,65.608 ; Q20.3@115.109,66.458 115.109,66.206 Q20.10@115.707,65.608 ; Q20.7@115.759,64.758 115.759,65.518 Q20.10@115.849,65.608 ; Q20.2@115.759,66.458 115.759,65.698 Q20.10@115.849,65.608 ; Q20.8@116.409,64.758 116.409,65.048 Q20.10@115.849,65.608 ; Q20.1@116.409,66.366 Q20.1@116.409,66.458 ; Q20.10@115.707,65.608 Q20.10@115.849,65.608
  Top Layer w0.5: Q20.10@115.849,65.608 Q20.10@116.508,66.267 ; Q20.1@116.409,66.366 Q20.10@116.508,66.267 ; 118.363,66.285 118.345,66.267 Q20.10@116.508,66.267
3V3_stmDisableP: U1.16 U39.1
3V3_stmDisableS: U1.17 U39.3
5V: R80.1 R84.1 R86.1 U22.12 | length 6.8
  Top Layer w0.4: R84.1@147.447,32.658 148.881,32.671 149.97,33.78 150.994,33.79 U22.12@151.045,33.79
  Top Layer w0.5: R86.1@144.753,32.658 R84.1@147.447,32.658
5V_1: C8.2 D1.2 D52.2 L1.2 R9.2 | length 5.8
  Top Layer w0.508: 41.808,22.301 42.545,22.301 42.672,22.428 44.888,22.428 L1.2@45.081,22.621 45.274,22.428 47.286,22.428 ; 47.763,22.621 47.828,22.556
5V_2: C12.2 D3.2 D53.2 L2.2 R12.2 | length 5.5
  Top Layer w0.508: 59.665,22.428 63.83,22.428 ; 61.743,21.315 L2.2@61.743,22.596 L2.2@61.747,22.592
5V_EnableP: D56.1 U22.1 | length 3.4
  Top Layer w0.3: D56.1@151.991,29.413 U22.1@151.991,32.782
5V_EnablePWD: D63.1 D64.1 | length 2
  Top Layer w0.3: D63.1@29.159,59.741 29.159,59.773 D64.1@30.556,61.17
5V_EnableS: D57.1 U24.1 | length 6.4
  Top Layer w0.254: D57.1@143.739,56.157 144.981,56.157 146.685,57.861 147.345,57.861 148.717,59.233 U24.1@148.717,59.351
5V_Primary: Q14.1 Q14.2 Q14.3 Q14.6 Q14.7 Q14.8 Q14.10
  other v1: 156.388,40.03
5V_Secondary: Q16.1 Q16.2 Q16.3 Q16.6 Q16.7 Q16.8 Q16.10
5V_stmDisableS: U1.21 U39.5
5V_stmEnableP1: D63.2 U1.25 | length 2.5
  Top Layer w0.3: U1.25@25.742,63.156 27.481,61.417 D63.2@27.483,61.417
5V_stmEnableP2: D64.2 U1.29 | length 2.5
  Top Layer w0.3: U1.29@27.156,64.57 D64.2@28.88,62.846 D64.2@28.88,62.814
12V: R150.1 R151.1 R155.1 U60.12 | length 6.9
  Top Layer w0.3: R150.1@109.5,6.824 111.224,6.824 112.3,7.9 U60.12@113.5,7.9
  Top Layer w0.5: R155.1@107.05,6.8 107.05,6.824 R150.1@109.5,6.824
12V_EnableP: D?.1 U60.1 | length 3.9
  Top Layer w0.3: D?.1@114.4,3.015 U60.1@114.4,6.919
12V_Primary: Q?.1 Q?.2 Q?.3 Q?.6 Q?.7 Q?.8 Q?.10 | length 1
  Top Layer w0.3: Q?.10@116.375,14.6 116.975,14 Q?.10@117.115,14
B.5: H1.30
B.5_VD: R40.2 R41.1 U1.26
BOOST2_1: C5.1 D1.1 U2.1
BOOST2_2: C10.1 D3.1 U3.1
BOOST_1: C21.1 D5.1 U7.1
BOOST_2: C26.1 D7.1 U8.1
Boot0: H1.8 P1.2
BWE0: H1.14
C\E\m\p\p\t\: U1.24
FB2_1: R9.1 R11.2 U2.3
FB2_2: R12.1 R26.2 U3.3
FB_1: R28.1 R29.2 U7.3
FB_2: R34.1 R44.2 U8.3
GND: C1.2 C2.2 C3.2 C4.2 C6.2 C7.2 C8.1 C11.2 C12.1 C19.2 C23.2 C24.1 C25.2 C27.2 C28.2 C29.1 C75.2 C76.2 C77.2 C79.2 C80.2 C82.2 C83.2 C85.2 C86.2 C88.2 C89.2 C91.2 C92.2 C94.2 C95.1 C96.2 C97.1 C98.2 C99.2 C100.2 C101.2 C102.2 C103.2 C104.2 C121.2 C122.2 Cc1.2 Cc.2 Cin1.2 Cin.2 Cout1.2 Cout.2 D2.2 D4.2 D6.2 D8.2 D38.2 D41.2 D47.2 D50.2 D56.2 D57.2 D58.2 D59.2 D60.2 D61.2 D?.2 GND.1 H2.13 H2.14 H2.29 H2.30 H2.31 H2.32 H2.47 H2.48 J5.3 J5.4 LED1.1 LED2.1 LED3.1 LED4.1 LED5.1 LED6.1 P1.1 R11.1 R26.1 R29.1 R41.2 R44.1 RFB2.2 RFB21.2 SW1.1 SW2.1 SW3.1 SW3.2 U1.12 U1.18 U1.31 U1.47 U1.63 U2.2 U3.2 U7.2 U8.2 U18.2 U18.5 U22.6 U22.13 U23.3 U23.7 U23.8 U24.6 U24.13 U25.3 U25.8 U26.6 U26.13 U27.3 U27.8 U28.6 U28.13 U29.3 U29.8 U30.6 U30.13 U31.3 U31.7 U32.6 U32.13 U33.3 U34.4 U34.5 U35.4 U35.5 U36.3 U37.3 U38.4 U38.5 U39.7 U40.2 U40.6 U41.6 U50.4 U50.7 U51.4 U51.7 U60.6 U60.13 U61.3 U61.7 U61.8 | length 164
  Top Layer w0.3: U60.6@116.391,8.909 117.908,8.909 118.086,9.087 v1(118.142,9.087) ; U26.6@116.535,34.163 117.475,34.163 120,36.688 C83.2@120.001,37.8
  Top Layer w0.381: SW2.1@-33.655,6.354 -33.702,6.401 -33.757,6.346 -33.757,4.242 -33.249,3.734 C98.2@-31.866,3.734 ; C98.2@-31.866,3.684 -31.641,3.459 C97.1@-31.641,2.286 -31.641,1.366 -31.418,1.143 -29.731,1.143 -28.497,2.378 U35.4@-28.101,2.378 U35.5@-26.001,2.378 ; SW1.1@-17.473,6.807 -17.473,4.373 -17,3.9 C96.2@-15.88,3.9 ; C96.2@-15.9,3.9 -15.909,3.891 -15.909,2.397 C95.1@-15.919,2.388 -15.978,2.328 -15.978,2.109 -16,2.087 -16,1.392 -15.777,1.168 -13.628,1.168 -12.19,2.606 U34.4@-11.795,2.606 U34.5@-9.694,2.606 ; J5.3@5.864,81.175 J5.4@9.934,81.175 ; U2.2@41.904,13.005 42.063,12.845 42.67,12.845 43.26,12.255 43.26,11.542 43.301,11.501 43.301,8.097 R11.1@43.282,8.077 43.307,8.052 43.307,6.198 v2(43.332,6.172) ; U3.2@58.515,13.005 58.675,12.845 59.282,12.845 59.872,12.255 59.872,8.088 R26.1@59.883,8.077 59.875,8.07 59.875,6.18 v2(59.868,6.172) ; RFB2.2@73.889,24.345 74.738,24.345 74.869,24.476 U50.4@76.11,24.476 77.77,24.476 79.07,25.776 U50.7@80.76,25.776 ; U51.7@75.323,12.172 77.018,12.172 ; Cout.2@76.352,18.996 79.712,18.996 Cout1.2@79.731,18.977 ; Cc.2@77.876,29.115 77.908,29.083 79.096,29.083 ; Cc1.2@78.207,8.833 78.175,8.865 Cin1.2@75.565,8.865 75.565,9.041 77.018,10.494 77.018,12.172 ; 79.096,25.776 79.096,29.083 ; Cin.2@80.515,29.083 79.096,29.083 ; RFB21.2@82.194,13.603 81.37,13.603 81.239,13.472 U51.4@79.973,13.472 78.318,13.472 77.018,12.172 ; SW3.1@83.493,76.109 SW3.2@83.493,80.609 ; U29.8@100.544,59.893 U29.8@100.552,59.902 ; v1(101.803,36.322) 101.803,38.014 U27.8@101.829,38.039 ; U29.3@102.836,61.184 U29.3@102.845,61.193 102.853,61.202 103.914,61.202 105.395,62.683 105.395,63.776 C88.2@105.424,63.805 ; U27.3@104.097,39.339 104.796,39.339 104.804,39.348 105.255,39.348 105.715,39.808 105.715,41.949 C85.2@105.525,42.139 ; U28.13@114.384,60.206 114.884,60.706 116.279,60.706 116.688,61.114 118.596,61.114 118.819,61.337 C86.2@118.819,62.662 118.845,62.662 118.364,63.143 C100.2@118.364,64.984 ; C2.2@119.928,42.012 119.914,41.997 119.914,40.32 120,40.234 v1(120,40.2) C83.2@120.001,37.8 ; U25.8@133.919,60.208 133.928,60.217 134.792,60.217 135.077,60.503 135.077,61.112 135.484,61.519 U25.3@136.22,61.519 ; U23.7@136.017,34.026 136.026,34.034 136.858,34.034 137.49,34.667 138.309,34.667 U23.3@138.318,34.676 138.327,34.684 139.239,34.684 140.335,35.781 C79.2@140.335,37.121 ; U24.13@149.217,60.841 149.717,61.341 U24.6@150.708,61.341 ; U24.6@150.85,61.35 152.946,63.446 154.83,63.446 155.054,63.67 C80.2@155.054,64.79 155.054,66.273 153.929,67.398 C101.2@153.929,67.423 ; U22.6@154.25,34.773 155.012,34.773 155.469,35.23 155.642,35.23 v1(155.667,35.254) ; C3.2@157.825,41.275 157.838,41.262 159.118,41.262 v1(159.131,41.25) ; C77.2@158.242,37.109 v1(160.299,37.109)
  Top Layer w0.508: U7.2@8.788,13.274 8.884,13.178 9.776,13.178 10.073,12.88 R29.1@10.073,8.331 10.079,8.326 10.079,6.381 v2(10.084,6.375) ; U8.2@25.445,13.437 25.515,13.366 26.398,13.366 26.695,13.068 26.695,8.626 R44.1@26.787,8.534 ; v2(26.746,6.604) 26.754,6.611 26.754,8.527 R44.1@26.761,8.534
  Bottom Layer w0.508: C89.2@60.935,46.064 60.96,46.064 63.387,43.637 U30.13@65.126,43.637 ; C89.2@61.138,45.632 C89.2@61.164,45.632 ; U32.13@76.987,64.837 78.186,64.837 79.815,63.207 80.441,63.207 C92.2@80.924,62.724
  other v1: 118.6,35.3 105.715,40.615 7.899,81.175
  other v2: 83.49,78.435
  other v3: 137.211,34.366
I2CFault: U1.43 U38.7
NetC77_1: C77.1 U22.8 | length 4.9
  Top Layer w0.381: U22.8@152.484,35.763 152.484,36.336 153.258,37.109 C77.1@156.478,37.109
NetC78_1: C78.1 R87.2 U23.2 | length 6
  Top Layer w0.508: U23.2@138.318,34.026 139.664,34.026 140.148,34.51 C78.1@141.202,34.51 142.282,34.51 142.977,35.204 R87.2@143.847,35.204
NetC78_2: C78.2 R86.2 U23.1 | length 3.8
  Top Layer w0.508: U23.1@138.318,33.36 C78.2@141.202,33.36 ; 142.977,32.639 R86.2@143.847,32.639
NetC80_1: C80.1 U24.8 | length 5.1
  Top Layer w0.305: U24.8@149.24,62.763 149.24,63.185 150.355,64.3 152.762,64.3 C80.1@153.252,64.79
NetC81_1: C81.1 R96.2 U25.2 | length 4.8
  Top Layer w0.381: U25.2@136.22,60.858 136.229,60.867 137.375,60.867 137.713,61.205 C81.1@138.709,61.205 ; C81.1@138.709,61.23 138.819,61.34 139.47,61.34 139.996,61.866 140.537,61.866 R96.2@140.596,61.925
NetC81_2: C81.2 R95.2 U25.1 | length 4.8
  Top Layer w0.381: U25.1@136.246,60.183 137.404,60.183 137.592,59.995 138.649,59.995 C81.2@138.709,60.055 ; C81.2@138.633,59.969 138.67,59.933 139.483,59.933 139.991,59.424 140.53,59.424 140.589,59.364 R95.2@140.589,59.36
NetC83_1: C83.1 U26.8 | length 4.9
  Top Layer w0.3: U26.8@115.045,35.154 115.07,35.179 115.07,36.37 116.5,37.8 C83.1@118.199,37.8
NetC84_1: C84.1 R105.2 U27.2 | length 7.7
  Top Layer w0.5: U27.2@104.097,38.689 v1@106.299,38.689 ; C84.1@104.941,34.052 105.661,34.773 R105.2@106.281,34.773 v1@106.281,38.677
  other v1: 106.274,38.659
NetC84_2: C84.2 R104.2 U27.1 | length 7.5
  Top Layer w0.5: U27.1@103.962,38.024 103.962,33.376 104.261,33.077 104.766,33.077 C84.2@104.941,32.902 105.636,32.207 R104.2@106.281,32.207
NetC86_1: C86.1 U28.8 | length 3.4
  Top Layer w0.381: U28.8@114.384,61.696 114.384,62.34 114.706,62.662 C86.1@117.018,62.662
NetC87_1: C87.1 R114.2 U29.2 | length 4.2
  Top Layer w0.381: U29.2@102.845,60.528 U29.2@102.853,60.537 ; U29.2@102.845,60.543 C87.1@105.156,60.544 ; C87.1@105.156,60.544 105.655,60.544 106.375,61.265 R114.2@106.763,61.265
NetC87_2: C87.2 R113.2 U29.1 | length 4.4
  Top Layer w0.381: U29.1@102.845,59.893 102.902,59.836 103.943,59.836 104.383,59.397 105.154,59.397 C87.2@105.156,59.394 ; C87.2@105.156,59.36 105.664,59.36 106.35,58.674 R113.2@106.763,58.674
NetC89_1: C89.1 U30.8 | length 6.3
  Bottom Layer w0.381: C89.1@60.935,47.865 62.859,47.865 65.557,45.167 U30.8@65.557,44.594
NetC90_1: C90.1 R123.2 U31.2 | length 6.7
  Bottom Layer w0.381: R123.2@74.687,43.917 74.687,42.707 74.91,42.484 77.679,42.484 78.147,42.017 U31.2@79.85,42.017
NetC90_2: C90.2 R122.2 U31.1 | length 5.2
  Bottom Layer w0.381: R122.2@74.694,41.326 74.699,41.33 76.678,41.33 C90.2@76.683,41.335 76.699,41.351 79.834,41.351 U31.1@79.85,41.367
NetC92_1: C92.1 U32.8 | length 6.2
  Bottom Layer w0.508: U32.8@76.36,63.846 76.36,63.184 78.622,60.923 ; 78.672,60.923 C92.1@80.975,60.923
NetC93_1: C93.1 R132.2 U33.2 | length 6.6
  Bottom Layer w0.381: U33.2@62.644,66.797 64.132,66.797 64.6,66.329 C93.1@65.634,66.329 67.544,66.329 67.767,66.105 R132.2@67.767,64.941
NetC93_2: C93.2 R131.2 U33.1 | length 5.2
  Bottom Layer w0.381: U33.1@62.39,67.447 U33.1@62.406,67.463 ; U33.1@62.644,67.447 62.66,67.463 65.618,67.463 C93.2@65.634,67.479 65.638,67.483 67.77,67.483 R131.2@67.774,67.488
NetC95_2: C95.2 U34.3 | length 3.6
  Top Layer w0.381: C95.2@-15.019,2.388 -13.691,2.388 -12.822,3.256 U34.3@-11.795,3.256
NetC96_1: C96.1 U34.2 | length 2.7
  Top Layer w0.381: C96.1@-14.5,3.913 -11.801,3.913 U34.2@-11.795,3.906
NetC97_2: C97.2 U35.3 | length 3.1
  Top Layer w0.381: C97.2@-30.657,2.201 -30.682,2.201 -30.682,2.227 C97.2@-30.741,2.286 -30.741,2.311 -30.682,2.371 -29.933,2.371 -29.276,3.028 U35.3@-28.101,3.028 U35.3@-28.108,3.021
NetC98_1: C98.1 U35.2 | length 2.4
  Top Layer w0.381: C98.1@-30.466,3.734 -30.416,3.684 -28.108,3.684 U35.2@-28.101,3.678 U35.2@-28.108,3.671
NetC99_1: C99.1 R137.2 U38.1
NetC120_1: C120.1 R156.2 U61.2 | length 4.7
  Top Layer w0.381: U61.2@101.8,8.7 101.809,8.691 C120.1@104.2,8.691
  Top Layer w0.5: C120.1@104.2,8.675 104.925,9.4 R156.2@106.15,9.4
NetC120_2: C120.2 R155.2 U61.1 | length 4.9
  Top Layer w0.381: U61.1@101.8,8.05 102.455,8.05 103.005,7.5 104.175,7.5 C120.2@104.2,7.525
  Top Layer w0.5: C120.2@104.2,7.525 104.925,6.8 R155.2@106.15,6.8
NetC122_1: C122.1 U60.8 | length 4.9
  Top Layer w0.3: U60.8@114.9,9.9 114.9,10.6 115.5,11.2 C122.1@118.899,11.2
NetCc1_1: Cc1.1 Rc1.2 | length 1.8
  Top Layer w0.381: Cc1.1@78.207,8.058 Rc1.2@79.959,8.06
NetCc_1: Cc.1 Rc.2 | length 1.8
  Top Layer w0.381: Rc.2@76.098,29.888 Cc.1@77.876,29.889
NetCin1_1: Cin1.1 L12.1 U51.6 | length 6.3
  Top Layer w0.381: Cin1.1@72.612,8.865 72.619,8.871 L12.1@72.619,12.226 72.634,12.242 73.557,12.242 74.137,12.822 U51.6@75.323,12.822
NetCin_1: Cin.1 L11.1 U50.6 | length 6.3
  Top Layer w0.381: U50.6@80.76,25.126 82.047,25.126 82.628,25.706 83.449,25.706 L11.1@83.49,25.747 ; Cin.1@83.49,29.061 83.49,25.823 L11.1@83.566,25.747
NetCout1_1: Cout1.1 D12.1 RFB11.2 | length 8.5
  Top Layer w0.381: D12.1@76.631,16.027 79.727,16.027 Cout1.1@79.731,16.024 81.537,16.024 82.575,14.986 84.706,14.986 RFB11.2@84.734,15.014
NetCout_1: Cout.1 D11.1 RFB1.2 | length 8.2
  Top Layer w0.381: RFB1.2@71.78,22.959 73.358,22.959 74.368,21.949 Cout.1@76.352,21.949 ; Cout.1@76.179,21.946 D11.1@79.426,21.946
NetD11_2: D11.2 L11.2 U50.5 | length 0.1
  Top Layer w0.381: D11.2@80.746,21.946 D11.2@80.772,21.946 ; U50.5@80.746,24.462 U50.5@80.779,24.495
NetD12_2: D12.2 L12.2 U51.5 | length 0
  Top Layer w0.381: L12.2@72.619,13.478 L12.2@72.622,13.475 ; U51.5@75.311,13.483 U51.5@75.323,13.472 U51.5@75.319,13.475
NetH2_45: H2.45 H2.46
NetLED1_2: LED1.2 RLED1.1
NetLED2_2: LED2.2 RLED2.1
NetLED3_2: LED3.2 RLED3.1
NetLED4_2: LED4.2 RLED4.1
NetLED5_2: LED5.2 RLED5.1
NetLED6_2: LED6.2 RLED6.1
NetQ13_1: Q13.1 Q13.2 Q13.3 Q14.5 Q14.9 U22.9 | length 9.4
  Top Layer w0.381: Q13.3@150.764,40.734 Q13.2@150.764,39.464 Q13.1@150.764,38.194 151.003,38.194 151.117,38.08 151.117,37.561 151.34,37.338 152.298,37.338 ; U22.9@151.984,35.763 151.984,37.024 152.298,37.338 ; Q14.9@153.155,39.814 Q14.9@153.149,39.814 153.286,39.677 153.286,39.05 Q14.5@153.274,39.039 153.274,38.314 152.298,37.338
NetQ13_4: Q13.4 Q14.4 U22.10 | length 12.5
  Top Layer w0.381: U22.10@150.994,34.773 150.19,34.773 149.735,35.227 149.735,41.658 149.967,41.89 150.65,41.89 Q13.4@150.764,42.004 152.483,42.004 153.274,41.214 Q14.4@153.274,40.589
NetQ13_5-6-7-8: Q13.5-6-7-8 R84.2 R87.1 U22.11 | length 11.6
  Top Layer w0.4: R87.1@144.747,35.204 R87.1@144.75,35.208 ; R84.2@147.444,35.208 R84.2@147.447,35.211 148.051,35.174 148.837,35.181 cw(c148.838,34.781) 148.838,35.181 148.987,35.181 149.052,35.119 149.924,34.263 U22.11@150.994,34.273
  Top Layer w0.5: R87.1@144.75,35.208 R84.2@147.444,35.208
  Top Layer w1: R84.2@147.452,35.211 Q13.5-6-7-8@147.452,40.168
NetQ15_1: Q15.1 Q15.2 Q15.3 Q16.5 Q16.9 U24.9 | length 8.3
  Top Layer w0.305: Q15.1@146.406,63.703 Q15.2@146.406,64.973 ; Q15.3@146.406,66.243 Q15.2@146.406,64.973 ; Q16.9@148.59,65.761 148.59,65.69 148.715,65.565 Q16.5@148.715,64.986 148.715,64.976 148.713,64.973 Q15.2@146.406,64.973 ; U24.9@148.717,62.332 Q16.5@148.717,64.942